# Altium PCB ASB.PcbDoc (part 2 of 2)
Units mm, origin at the board's own origin, x right, y up, seen from the top; angles counter-clockwise.
Board outline 200 x 150 mm, 4 copper layers (Top Layer, Int1 (GND), Int2, Bottom Layer), stack 1.369 mm thick; 134 components, 97 nets, 431 pads, 0 vias.
Unrouted connection lines stored in the file: 248.
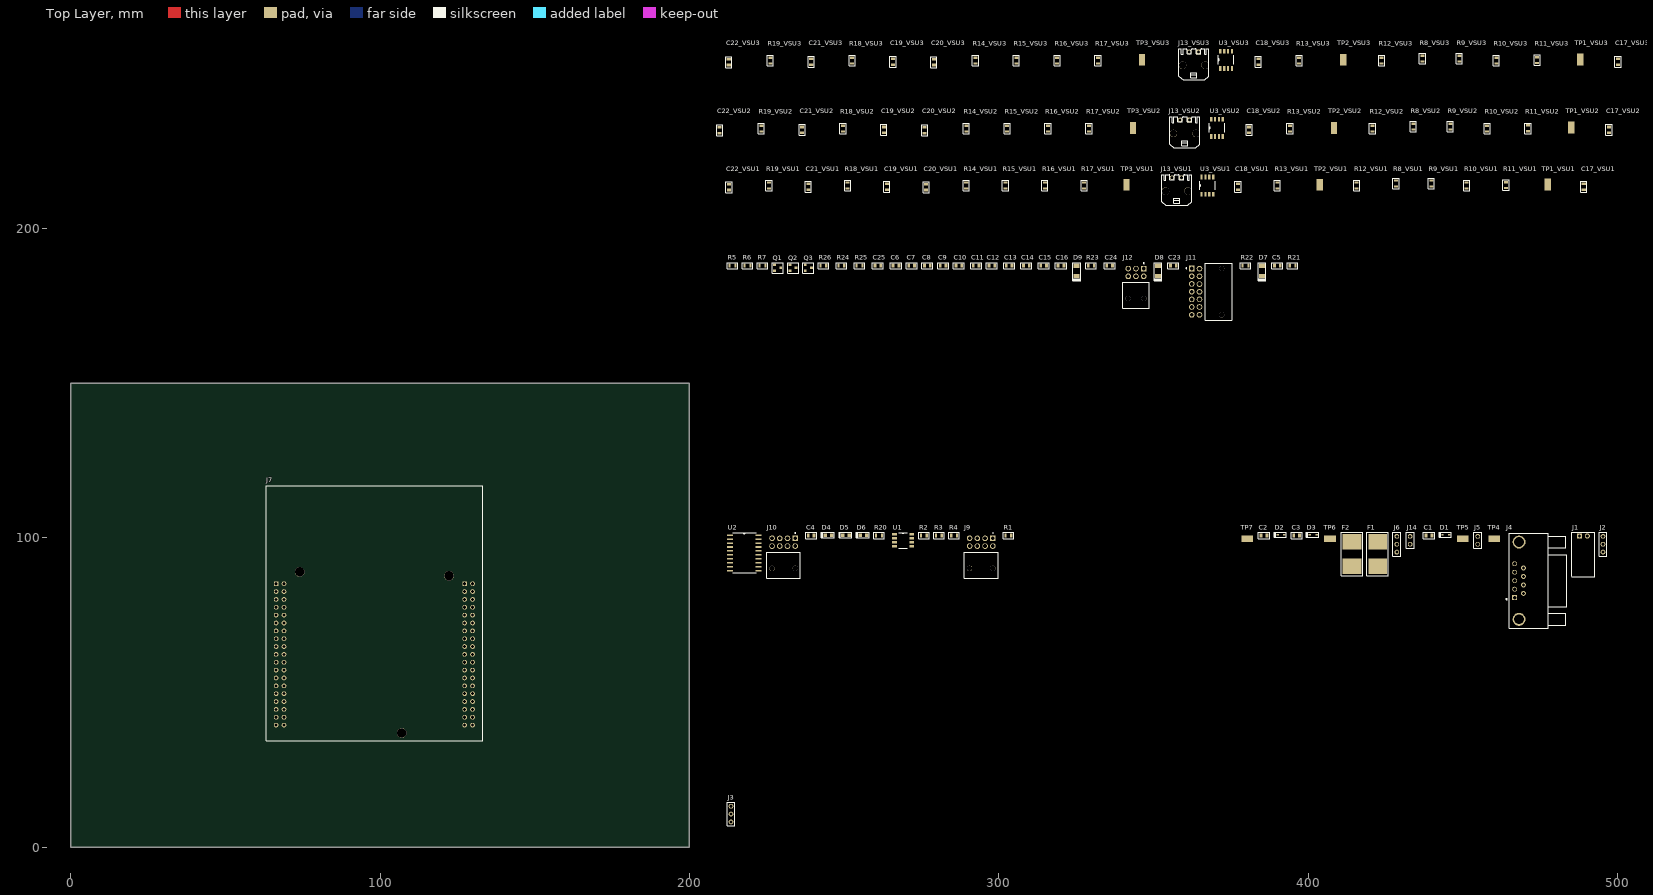
[diagram p0: Top Layer view]

## Part data (continued)
J4: library part 5747840-6, "CONN D-SUB PLUG 9POS R/A SOLDER", Case/Package=Metal, Color=Black, Current Rating=6A, Flammability Rating="UL94 V-0", Manufacturer="TE Connectivity", Max Operating Temperature=105°C, Min Operating Temperature=-55°C, Package Quantity=130, Supplier Part Number 1=A32094-ND, Voltage Rating=125V, Approvals=CSA,UL, Body Material=Metal, Body Plating=Tin, Category=Connectors, ComponentLink1Description=https://www.verical.com/server-webapp/html/getDatasheet?partID=46840&src-supplier=Verical, ComponentLink1URL=https://www.verical.com/server-webapp/html/getDatasheet?partID=46840&src-supplier=Verical, ComponentLink2Description=https://www.te.com/commerce/DocumentDelivery/DDEController?Action=srchrtrv&DocNm=82068_AMPLIMITE_Right-Angle_Posted_Conn&DocType=CS&DocLang=English&src-supplier=Digi-Key, ComponentLink2URL=https://www.te.com/commerce/DocumentDelivery/DDEController?Action=srchrtrv&DocNm=82068_AMPLIMITE_Right-Angle_Posted_Conn&DocType=CS&DocLang=English&src-supplier=Digi-Key, ComponentLink3Description=http://www.jameco.com/Jameco/Products/ProdDS/853231.pdf?src-supplier=Jameco, ComponentLink3URL=http://www.jameco.com/Jameco/Products/ProdDS/853231.pdf?src-supplier=Jameco, ComponentLink4Description=http://www.te.com/commerce/DocumentDelivery/DDEController?Action=srchrtrv&DocNm=82068_AMPLIMITE_Right-Angle_Posted_Conn&DocType=Catalog+Section&DocLang=English&src-supplier=Avnet+Europe, ComponentLink4URL=http://www.te.com/commerce/DocumentDelivery/DDEController?Action=srchrtrv&DocNm=82068_AMPLIMITE_Right-Angle_Posted_Conn&DocType=Catalog+Section&DocLang=English&src-supplier=Avnet+Europe, ComponentLink5Description=http://www.te.com/commerce/DocumentDelivery/DDEController?Action=srchrtrv&DocNm=82068_AMPLIMITE_Right-Angle_Posted_Conn&DocType=Catalog+Section&DocLang=English&src-supplier=Avnet, ComponentLink5URL=http://www.te.com/commerce/DocumentDelivery/DDEController?Action=srchrtrv&DocNm=82068_AMPLIMITE_Right-Angle_Posted_Conn&DocType=Catalog+Section&DocLang=English&src-supplier=Avnet, ComponentLink6Description=http://www.te.com/commerce/DocumentDelivery/DDEController?Action=srchrtrv&DocNm=82068_AMPLIMITE_Right-Angle_Posted_Conn&DocType=Catalog+Section&DocLang=English&PartCntxt=&src-supplier=Element14, ComponentLink6URL=http://www.te.com/commerce/DocumentDelivery/DDEController?Action=srchrtrv&DocNm=82068_AMPLIMITE_Right-Angle_Posted_Conn&DocType=Catalog+Section&DocLang=English&PartCntxt=&src-supplier=Element14, Connector Type=Plug, Contact Material=Brass, Contact Plating=Gold,Nickel,Tin, Contact Post Length=3.17mm, Contact Shape=Round, Depth=18.62mm, Gender=Male, Height=12.55mm, Hole Diameter=0.125inch, Housing Color=Black, Housing Material=Nylon, Length=30.81mm, Manufacturer Part Number=5747840-6, Material=Metal, Mating Connector Lock="Yes (With)", Mating Retention="Yes (With)", Mount="Through Hole", Number of Contacts=9, Number of Ports=1, Number of Positions=9, Number of Rows=2, Number of Terminals=9, Orientation="Right Angle", Packaging=Tray, PCB Mount Alignment="Yes (With)", PCB Mounting Orientation="Right Angle", PCB Mount Retention=With, PCB Thickness=1.57mm, Pitch=2.74mm, Plating=Tin, Preloaded=Yes, Pricing 1="1 = 4.13000, 10 = 3.96400, 25 = 3.63360, 50 = 3.46860, 130 = 3.30338, 260 = 2.89046, 520 = 2.80788, 1040 = 2.39496, 2600 = 2.22980 (USD)", Radiation Hardening=No, REACH SVHC="No SVHC", RoHS=Yes, Sealable="No (Without)", Shell Material=Steel, Stock 1=2830, Supplier 1=Digi-Key, Termination=Solder, Width=12.55mm
J5 J14: library part 0901200762, "CONN HEADER VERT 2POS 2.54MM", Color=Black, Contact Resistance=20mR, Manufacturer=Molex, Max Operating Temperature=125°C, Max Voltage Rating (AC)=350V, Min Operating Temperature=-55°C, Supplier Part Number 1=WM8084-ND, Category=Connectors, ComponentLink1Description=https://datasheet.ciiva.com/711/901200762-sd-711939.pdf?src-supplier=Digi-Key, ComponentLink1URL=https://datasheet.ciiva.com/711/901200762-sd-711939.pdf?src-supplier=Digi-Key, ComponentLink2Description=https://datasheet.ciiva.com/3117/0901200762-pcb-headers-3117809.pdf?src-supplier=Avnet, ComponentLink2URL=https://datasheet.ciiva.com/3117/0901200762-pcb-headers-3117809.pdf?src-supplier=Avnet, Connector Type="Male Pin", Contact Material=Brass, Contact Mating Length=0.266inch, Contact Plating=Gold, Depth=2.54mm, Gender=Male, Housing Color=Black, Housing Material=Polyester, Length=5.08mm, Manufacturer Part Number=0901200762, Max Voltage Rating (DC)=350V, Mount="Through Hole", Number of Contacts=2, Number of Positions=2, Number of Rows=1, Orientation=Straight, Packaging=Bulk, Pitch=2.54mm, Pricing 1="1 = 0.560000, 10 = 0.530000, 100 = 0.406000, 500 = 0.353000, 1000 = 0.291230, 5000 = 0.255930, 10000 = 0.238280 (USD)", RoHS=Yes, Stock 1=37733, Supplier 1=Digi-Key, Termination=Solder
J7: library part "STM32 Nucleo Connector", "SAMTEC         ESQ-119-24-T-D             Board-To-Board Connector, Vertical, ESQ Series, 38 Contacts, Receptacle, 2.54 mm, Through Hole 123", Manufacturer=Samtec, Manufacturer Part Number=ESQ-119-24-T-D, Supplier Part Number 1=SAM9313-ND, Category=Connectors, Contact Material=Bronze, Contact Plating=Tin, Gender=Receptacle, Mount="Through Hole", Number of Contacts=38, Number of Rows=2, Pitch=2.54mm, Pricing 1="1 = 5.23000, 11 = 4.42182, 110 = 3.41700, 506 = 2.81399, 1001 = 2.61300 (USD)", REACH SVHC="No SVHC", RoHS=Yes, Stock 1=71, Supplier 1=Digi-Key, Termination=Solder
J9 J10: library part 1053141208, "CONN HEADER R/A 8POS 2.5MM", Color=Black, Manufacturer=Molex, Supplier Part Number 1=WM14978-ND, Category=Connectors, ComponentLink1Description=https://www.molex.com/pdm_docs/ps/PS-105300-100-001.pdf?src-supplier=Digi-Key, ComponentLink1URL=https://www.molex.com/pdm_docs/ps/PS-105300-100-001.pdf?src-supplier=Digi-Key, ComponentLink2Description=http://www.farnell.com/datasheets/2059602.pdf?src-supplier=Element14, ComponentLink2URL=http://www.farnell.com/datasheets/2059602.pdf?src-supplier=Element14, Contact Material=Brass, Contact Plating=Gold, Gender=Male, Manufacturer Part Number=1053141208, Mount="Through Hole", Number of Rows=2, Pricing 1="1 = 2.35000, 10 = 2.13500, 156 = 1.82994, 624 = 1.52495, 1092 = 1.30710, 5148 = 1.15896 (USD)", REACH SVHC=Unknown, RoHS=No, Stock 1=3073, Supplier 1=Digi-Key, Termination="Through Hole"
J11: library part 1053141214, "CONN HEADER R/A 14POS 2.5MM", Manufacturer=Molex, Supplier Part Number 1=WM15164-ND, Category=Connectors, ComponentLink1Description=https://www.molex.com/pdm_docs/ps/PS-105300-100-001.pdf?src-supplier=Digi-Key, ComponentLink1URL=https://www.molex.com/pdm_docs/ps/PS-105300-100-001.pdf?src-supplier=Digi-Key, Manufacturer Part Number=1053141214, Pricing 1="1 = 3.04000, 90 = 2.55378, 180 = 2.43222, 540 = 2.06737, 1080 = 1.76334, 5040 = 1.58093 (USD)", RoHS=No, Stock 1=970, Supplier 1=Digi-Key
J12: library part 1053141206, "CONN HEADER R/A 6POS 2.5MM", Color=Black, Manufacturer=Molex, Supplier Part Number 1=WM14977-ND, Category=Connectors, ComponentLink1Description=http://www.farnell.com/datasheets/2221464.pdf?src-supplier=Farnell, ComponentLink1URL=http://www.farnell.com/datasheets/2221464.pdf?src-supplier=Farnell, ComponentLink2Description=http://www.farnell.com/datasheets/2059602.pdf?src-supplier=Element14, ComponentLink2URL=http://www.farnell.com/datasheets/2059602.pdf?src-supplier=Element14, ComponentLink3Description=https://www.molex.com/pdm_docs/ps/PS-105300-100-001.pdf?src-supplier=Digi-Key, ComponentLink3URL=https://www.molex.com/pdm_docs/ps/PS-105300-100-001.pdf?src-supplier=Digi-Key, Contact Material=Brass, Contact Plating=Gold, Gender=Male, Manufacturer Part Number=1053141206, Mount="Through Hole", Number of Rows=2, Pricing 1="1 = 1.86000, 10 = 1.68400, 204 = 1.44314, 612 = 1.20260, 1020 = 1.03080, 5100 = 0.91398, 10200 = 0.89336 (USD)", REACH SVHC=Unknown, RoHS=No, Stock 1=3725, Supplier 1=Digi-Key, Termination="Through Hole"
J13_VSU1 J13_VSU2 J13_VSU3: library part 43650-0205, "HEADER, RIGHT ANGLE, 2WAY", Current Rating=5A, Manufacturer=Molex, Package Quantity=3927, Supplier Part Number 1=WM17581-ND, Voltage Rating=600V, Category=Connectors, ComponentLink1Description=http://www.farnell.com/cad/153635.pdf?src-supplier=Element14, ComponentLink1URL=http://www.farnell.com/cad/153635.pdf?src-supplier=Element14, ComponentLink2Description=http://www.molex.com/webdocs/datasheets/pdf/en-us/0436500205_PCB_HEADERS.pdf?src-supplier=Avnet, ComponentLink2URL=http://www.molex.com/webdocs/datasheets/pdf/en-us/0436500205_PCB_HEADERS.pdf?src-supplier=Avnet, ComponentLink3Description=http://www.molex.com/webdocs/datasheets/pdf/en-us/0436500205_PCB_HEADERS.pdf?src-supplier=Avnet+Europe, ComponentLink3URL=http://www.molex.com/webdocs/datasheets/pdf/en-us/0436500205_PCB_HEADERS.pdf?src-supplier=Avnet+Europe, ComponentLink4Description=http://www.mouser.com/ds/2/276/0436500205_PCB_HEADERS-148686.pdf?src-supplier=Mouser, ComponentLink4URL=http://www.mouser.com/ds/2/276/0436500205_PCB_HEADERS-148686.pdf?src-supplier=Mouser, ComponentLink5Description=Digikey, ComponentLink5URL=https://www.digikey.com/products/en?WT.z_cid=sp_900_0310_buynow&keywords=436500205, Contact Material=Brass, Contact Plating=Gold, Gender=Male, Glow Wire Compliant=Compliant, Halogen Free="Low Halogen", Housing Material=Thermoplastic, Manufacturer Part Number=43650-0205, Number of Circuits=2, Number of Contacts=2, Number of Positions=2, Number of Rows=1, Orientation="Right Angle", Packaging=Tray, Pitch=3mm, Pricing 1="1 = 1.44000, 10 = 1.30500, 100 = 1.11870, 500 = 0.93222, 3927 = 0.74578, 7854 = 0.70849, 11781 = 0.69251 (USD)", RoHS=Yes, Stock 1=2695, Supplier 1=Digi-Key, Termination="Through Hole"
Q1 Q2 Q3: library part DMG6968U-7, "MOSFET N-CH 20V 6.5A SOT-23", Case/Package=SOT-23, Continuous Drain Current (ID)=6.5A, Drain to Source Breakdown Voltage=20V, Drain to Source Resistance=25mR, Gate to Source Voltage (Vgs)=12V, Input Capacitance=151pF, Manufacturer=Diodes, Max Operating Temperature=150°C, Max Power Dissipation=1.3W, Min Operating Temperature=-55°C, On-State Resistance=36mR, Package Quantity=3000, Supplier Part Number 1=DMG6968UDICT-ND, Threshold Voltage=500mV, Category="Discrete Semiconductor Products", ComponentLink1Description=https://datasheet.ciiva.com/5774/ds31738-5774992.pdf?src-supplier=Farnell, ComponentLink1URL=https://datasheet.ciiva.com/5774/ds31738-5774992.pdf?src-supplier=Farnell, ComponentLink2Description=https://datasheet.ciiva.com/26789/dmg6968u-7-26789941.pdf?src-supplier=IIIC, ComponentLink2URL=https://datasheet.ciiva.com/26789/dmg6968u-7-26789941.pdf?src-supplier=IIIC, ComponentLink3Description=https://datasheet.ciiva.com/935/ds31738-935016.pdf?src-supplier=Digi-Key, ComponentLink3URL=https://datasheet.ciiva.com/935/ds31738-935016.pdf?src-supplier=Digi-Key, ComponentLink4Description=https://datasheet.ciiva.com/935/ds31738-935018.pdf?src-supplier=Digi-Key, ComponentLink4URL=https://datasheet.ciiva.com/935/ds31738-935018.pdf?src-supplier=Digi-Key, ComponentLink5Description=https://datasheet.ciiva.com/935/ds31738-935017.pdf?src-supplier=Digi-Key, ComponentLink5URL=https://datasheet.ciiva.com/935/ds31738-935017.pdf?src-supplier=Digi-Key, ComponentLink6Description=https://datasheet.ciiva.com/22712/1915638-22712395.pdf?src-supplier=Element14, ComponentLink6URL=https://datasheet.ciiva.com/22712/1915638-22712395.pdf?src-supplier=Element14, Drain to Source Voltage (Vdss)=20V, Element Configuration=Single, Fall Time=205ns, Height=1mm, Lead Free="Lead Free", Length=2.9mm, Manufacturer Part Number=DMG6968U-7, Mount="Surface Mount", Nominal Vgs=500mV, Number of Channels=1, Number of Elements=1, Number of Pins=3, Packaging="Tape and Reel", Power Dissipation=1.3W, Pricing 1="1 = 0.59000, 10 = 0.41800, 100 = 0.27420, 500 = 0.16202, 1000 = 0.12463 (USD)", Radiation Hardening=No, Rds On Max=25mR, REACH SVHC="No SVHC", Rise Time=66ns, RoHS=Yes, Stock 1=169109, Supplier 1=Digi-Key, Turn-Off Delay Time=613ns, Turn-On Delay Time=54ns, Weight=0.000282oz, Width=1.3mm
R1 R13_VSU1 R13_VSU2 R13_VSU3 R19_VSU1 R19_VSU2 R19_VSU3 R21 R22 R23: library part ERJ6ENF1001V, "RES SMD 1K OHM 1% 1/8W 0805", Case/Package=0805, Case Code (Metric)=2012, Manufacturer=Panasonic, Max Operating Temperature=155°C, Max Power Dissipation=125mW, Min Operating Temperature=-55°C, Package Quantity=1, Resistance=1kR, Supplier Part Number 1=P1.00KCCT-ND, Temperature Coefficient=100ppm/°C, Tolerance=1%, Voltage Rating=150V, Case Code (Imperial)=0805, Category=Resistors, ComponentLink1Description=https://datasheet.ciiva.com/34303/1988962-34303619.pdf?src-supplier=Jameco, ComponentLink1URL=https://datasheet.ciiva.com/34303/1988962-34303619.pdf?src-supplier=Jameco, ComponentLink2Description=https://datasheet.ciiva.com/11808/0900766b80f80784-11808500.pdf?src-supplier=RSComponents, ComponentLink2URL=https://datasheet.ciiva.com/11808/0900766b80f80784-11808500.pdf?src-supplier=RSComponents, ComponentLink3Description=https://datasheet.ciiva.com/28532/426256-28532134.pdf?src-supplier=Element14, ComponentLink3URL=https://datasheet.ciiva.com/28532/426256-28532134.pdf?src-supplier=Element14, ComponentLink4Description=https://datasheet.ciiva.com/30051/aoa0000ce2-30051974.pdf?src-supplier=Onlinecomponents.com, ComponentLink4URL=https://datasheet.ciiva.com/30051/aoa0000ce2-30051974.pdf?src-supplier=Onlinecomponents.com, ComponentLink5Description=https://datasheet.ciiva.com/16774/70260748-16774249.pdf?src-supplier=Allied+Electronics, ComponentLink5URL=https://datasheet.ciiva.com/16774/70260748-16774249.pdf?src-supplier=Allied+Electronics, ComponentLink6Description=https://datasheet.ciiva.com/46373/1678782-46373337.pdf?src-supplier=Element14, ComponentLink6URL=https://datasheet.ciiva.com/46373/1678782-46373337.pdf?src-supplier=Element14, ComponentLink7Description=https://datasheet.ciiva.com/46373/1678782-46373338.pdf?src-supplier=Element14, ComponentLink7URL=https://datasheet.ciiva.com/46373/1678782-46373338.pdf?src-supplier=Element14, ComponentLink8Description=https://datasheet.ciiva.com/48532/aoa0000ce2-48532156.pdf?src-supplier=Avnet, ComponentLink8URL=https://datasheet.ciiva.com/48532/aoa0000ce2-48532156.pdf?src-supplier=Avnet, ComponentLink9Description=https://datasheet.ciiva.com/7942/426256-7942429.pdf?src-supplier=Element14, ComponentLink9URL=https://datasheet.ciiva.com/7942/426256-7942429.pdf?src-supplier=Element14, ComponentLink10Description=https://datasheet.ciiva.com/16199/aoa0000ce2-16199262.pdf?src-supplier=Future+Electronics, ComponentLink10URL=https://datasheet.ciiva.com/16199/aoa0000ce2-16199262.pdf?src-supplier=Future+Electronics, ComponentLink11Description=https://datasheet.ciiva.com/9117/aoa0000ce2-9117391.pdf?src-supplier=Avnet, ComponentLink11URL=https://datasheet.ciiva.com/9117/aoa0000ce2-9117391.pdf?src-supplier=Avnet, ComponentLink12Description=https://datasheet.ciiva.com/16523/aoa0000ce2-16523855.pdf?src-supplier=Avnet+Asia, ComponentLink12URL=https://datasheet.ciiva.com/16523/aoa0000ce2-16523855.pdf?src-supplier=Avnet+Asia, Composition="Thick Film", Contact Plating=Tin, Depth=1.25mm, Features="Automotive AEC-Q200", Height=0.6mm, Lead Free="Lead Free", Length=2mm, Manufacturer Part Number=ERJ6ENF1001V, Military Standard=Not, Mount="Surface Mount", Number of Pins=2, Number of Terminations=2, Packaging="Tape and Reel", Power Rating=125mW, Pricing 1="1 = 0.100000, 10 = 0.081000, 100 = 0.031100, 1000 = 0.013670, 2500 = 0.011810 (USD)", Radiation Hardening=No, REACH SVHC="No SVHC", RoHS=Yes, Stock 1=946321, Supplier 1=Digi-Key, Termination=SMD/SMT, Voltage Rating (DC)=150V, Width=0.049inch
R2 R3 R4 R24 R25 R26: library part ERJ6ENF1500V, "RES SMD 150 OHM 1% 1/8W 0805", Case/Package=0805, Case Code (Metric)=2012, Manufacturer=Panasonic, Max Operating Temperature=155°C, Max Power Dissipation=125mW, Min Operating Temperature=-55°C, Package Quantity=1, Resistance=150R, Supplier Part Number 1=P150CCT-ND, Temperature Coefficient=100ppm/°C, Tolerance=1%, Voltage Rating=150V, Case Code (Imperial)=0805, Category=Resistors, ComponentLink1Description=https://datasheet.ciiva.com/11821/0900766b80f80784-11821520.pdf?src-supplier=RSComponents, ComponentLink1URL=https://datasheet.ciiva.com/11821/0900766b80f80784-11821520.pdf?src-supplier=RSComponents, ComponentLink2Description=https://datasheet.ciiva.com/7887/426256-7887029.pdf?src-supplier=Element14, ComponentLink2URL=https://datasheet.ciiva.com/7887/426256-7887029.pdf?src-supplier=Element14, ComponentLink3Description=https://datasheet.ciiva.com/16761/70260748-16761222.pdf?src-supplier=Allied+Electronics, ComponentLink3URL=https://datasheet.ciiva.com/16761/70260748-16761222.pdf?src-supplier=Allied+Electronics, ComponentLink4Description=https://datasheet.ciiva.com/46373/1678782-46373270.pdf?src-supplier=Element14, ComponentLink4URL=https://datasheet.ciiva.com/46373/1678782-46373270.pdf?src-supplier=Element14, ComponentLink5Description=https://datasheet.ciiva.com/46373/1678782-46373271.pdf?src-supplier=Element14, ComponentLink5URL=https://datasheet.ciiva.com/46373/1678782-46373271.pdf?src-supplier=Element14, ComponentLink6Description=https://datasheet.ciiva.com/30203/aoa0000ce2-30203641.pdf?src-supplier=Onlinecomponents.com, ComponentLink6URL=https://datasheet.ciiva.com/30203/aoa0000ce2-30203641.pdf?src-supplier=Onlinecomponents.com, ComponentLink7Description=https://datasheet.ciiva.com/9185/aoa0000ce2-9185514.pdf?src-supplier=Avnet, ComponentLink7URL=https://datasheet.ciiva.com/9185/aoa0000ce2-9185514.pdf?src-supplier=Avnet, Composition="Thick Film", Contact Plating=Tin, Depth=1.25mm, Features="Automotive AEC-Q200", Height=0.6mm, Lead Free="Lead Free", Length=2mm, Manufacturer Part Number=ERJ6ENF1500V, Military Standard=Not, Mount="Surface Mount", Number of Pins=2, Number of Terminations=2, Power Rating=125mW, Pricing 1="1 = 0.10000, 10 = 0.08100, 100 = 0.03110, 1000 = 0.01367, 2500 = 0.01181 (USD)", Radiation Hardening=No, REACH SVHC="No SVHC", RoHS=Yes, Stock 1=287199, Supplier 1=Digi-Key, Termination=SMD/SMT, Voltage Rating (DC)=150V, Width=0.049inch, Working Voltage=150V
R5 R6 R7 R11_VSU1 R11_VSU2 R11_VSU3 R17_VSU1 R17_VSU2 R17_VSU3: library part ERJ6ENF2002V, "RES SMD 20K OHM 1% 1/8W 0805", Case/Package=0805, Case Code (Metric)=2012, Manufacturer=Panasonic, Max Operating Temperature=155°C, Max Power Dissipation=125mW, Min Operating Temperature=-55°C, Package Quantity=1, Resistance=20kR, Supplier Part Number 1=P20.0KCCT-ND, Temperature Coefficient=100ppm/°C, Tolerance=1%, Voltage Rating=150V, Case Code (Imperial)=0805, Category=Resistors, ComponentLink1Description=https://datasheet.ciiva.com/11821/0900766b80f80784-11821565.pdf?src-supplier=RSComponents, ComponentLink1URL=https://datasheet.ciiva.com/11821/0900766b80f80784-11821565.pdf?src-supplier=RSComponents, ComponentLink2Description=https://datasheet.ciiva.com/30072/aoa0000ce2-30072453.pdf?src-supplier=Onlinecomponents.com, ComponentLink2URL=https://datasheet.ciiva.com/30072/aoa0000ce2-30072453.pdf?src-supplier=Onlinecomponents.com, ComponentLink3Description=https://datasheet.ciiva.com/43460/426256-43460054.pdf?src-supplier=Farnell, ComponentLink3URL=https://datasheet.ciiva.com/43460/426256-43460054.pdf?src-supplier=Farnell, ComponentLink4Description=https://datasheet.ciiva.com/16786/70260748-16786968.pdf?src-supplier=Allied+Electronics, ComponentLink4URL=https://datasheet.ciiva.com/16786/70260748-16786968.pdf?src-supplier=Allied+Electronics, ComponentLink5Description=https://datasheet.ciiva.com/9192/aoa0000ce2-9192153.pdf?src-supplier=Avnet, ComponentLink5URL=https://datasheet.ciiva.com/9192/aoa0000ce2-9192153.pdf?src-supplier=Avnet, ComponentLink6Description=https://datasheet.ciiva.com/48531/aoa0000ce2-48531785.pdf?src-supplier=Avnet, ComponentLink6URL=https://datasheet.ciiva.com/48531/aoa0000ce2-48531785.pdf?src-supplier=Avnet, ComponentLink7Description=https://datasheet.ciiva.com/15159/getdatasheetpartid-249649-15159066.pdf?src-supplier=Verical, ComponentLink7URL=https://datasheet.ciiva.com/15159/getdatasheetpartid-249649-15159066.pdf?src-supplier=Verical, ComponentLink8Description=https://datasheet.ciiva.com/17211/aoa0000ce2-17211115.pdf?src-supplier=Avnet+Europe, ComponentLink8URL=https://datasheet.ciiva.com/17211/aoa0000ce2-17211115.pdf?src-supplier=Avnet+Europe, ComponentLink9Description=https://datasheet.ciiva.com/46389/426256-46389083.pdf?src-supplier=Element14, ComponentLink9URL=https://datasheet.ciiva.com/46389/426256-46389083.pdf?src-supplier=Element14, ComponentLink10Description=https://datasheet.ciiva.com/46377/426256-46377356.pdf?src-supplier=Element14, ComponentLink10URL=https://datasheet.ciiva.com/46377/426256-46377356.pdf?src-supplier=Element14, ComponentLink11Description=https://datasheet.ciiva.com/24025/aoa0000ce2-24025709.pdf?src-supplier=Mouser, ComponentLink11URL=https://datasheet.ciiva.com/24025/aoa0000ce2-24025709.pdf?src-supplier=Mouser, ComponentLink12Description=https://datasheet.ciiva.com/28688/1678782-28688637.pdf?src-supplier=Element14, ComponentLink12URL=https://datasheet.ciiva.com/28688/1678782-28688637.pdf?src-supplier=Element14, ComponentLink13Description=https://datasheet.ciiva.com/16512/aoa0000ce2-16512158.pdf?src-supplier=Avnet+Asia, ComponentLink13URL=https://datasheet.ciiva.com/16512/aoa0000ce2-16512158.pdf?src-supplier=Avnet+Asia, ComponentLink14Description=https://datasheet.ciiva.com/22749/1678782-22749662.pdf?src-supplier=Element14, ComponentLink14URL=https://datasheet.ciiva.com/22749/1678782-22749662.pdf?src-supplier=Element14, Composition="Thick Film", Contact Plating=Tin, Depth=1.25mm, Features="Automotive AEC-Q200", Height=0.6mm, Lead Free="Lead Free", Length=2mm, Manufacturer Part Number=ERJ6ENF2002V, Military Standard=Not, Mount="Surface Mount", Number of Terminations=2, Packaging="Tape and Reel", Power Rating=125mW, Pricing 1="1 = 0.10000, 10 = 0.08100, 100 = 0.03110, 1000 = 0.01367, 2500 = 0.01181 (USD)", Radiation Hardening=No, REACH SVHC="No SVHC", RoHS=Yes, Stock 1=1039498, Supplier 1=Digi-Key, Termination=SMD/SMT, Voltage Rating (DC)=150V, Width=0.049inch, Working Voltage=150V
R8_VSU1 R8_VSU2 R8_VSU3 R9_VSU1 R9_VSU2 R9_VSU3 R10_VSU1 R10_VSU2 R10_VSU3 R14_VSU1 R14_VSU2 R14_VSU3 R15_VSU1 R15_VSU2 R15_VSU3 R16_VSU1 R16_VSU2 R16_VSU3: library part ERJ6ENF3001V, "RES SMD 3K OHM 1% 1/8W 0805", Case/Package=0805, Case Code (Metric)=2012, Manufacturer=Panasonic, Max Operating Temperature=155°C, Max Power Dissipation=125mW, Min Operating Temperature=-55°C, Package Quantity=1, Resistance=3kR, Supplier Part Number 1=P3.0KCCT-ND, Temperature Coefficient=100ppm/°C, Tolerance=1%, Voltage Rating=150V, Case Code (Imperial)=0805, Category=Resistors, ComponentLink1Description=https://datasheet.ciiva.com/11821/0900766b80f80784-11821622.pdf?src-supplier=RSComponents, ComponentLink1URL=https://datasheet.ciiva.com/11821/0900766b80f80784-11821622.pdf?src-supplier=RSComponents, ComponentLink2Description=https://datasheet.ciiva.com/30198/aoa0000ce2-30198229.pdf?src-supplier=Onlinecomponents.com, ComponentLink2URL=https://datasheet.ciiva.com/30198/aoa0000ce2-30198229.pdf?src-supplier=Onlinecomponents.com, ComponentLink3Description=https://datasheet.ciiva.com/17213/aoa0000ce2-17213863.pdf?src-supplier=Avnet+Europe, ComponentLink3URL=https://datasheet.ciiva.com/17213/aoa0000ce2-17213863.pdf?src-supplier=Avnet+Europe, ComponentLink4Description=https://datasheet.ciiva.com/24165/aoa0000ce2-24165784.pdf?src-supplier=Mouser, ComponentLink4URL=https://datasheet.ciiva.com/24165/aoa0000ce2-24165784.pdf?src-supplier=Mouser, ComponentLink5Description=https://datasheet.ciiva.com/9117/aoa0000ce2-9117481.pdf?src-supplier=Avnet, ComponentLink5URL=https://datasheet.ciiva.com/9117/aoa0000ce2-9117481.pdf?src-supplier=Avnet, ComponentLink6Description=https://datasheet.ciiva.com/28691/1678782-28691979.pdf?src-supplier=Element14, ComponentLink6URL=https://datasheet.ciiva.com/28691/1678782-28691979.pdf?src-supplier=Element14, ComponentLink7Description=https://datasheet.ciiva.com/46386/426256-46386363.pdf?src-supplier=Element14, ComponentLink7URL=https://datasheet.ciiva.com/46386/426256-46386363.pdf?src-supplier=Element14, ComponentLink8Description=https://datasheet.ciiva.com/16758/70260748-16758588.pdf?src-supplier=Allied+Electronics, ComponentLink8URL=https://datasheet.ciiva.com/16758/70260748-16758588.pdf?src-supplier=Allied+Electronics, ComponentLink9Description=https://datasheet.ciiva.com/6137/426256-6137581.pdf?src-supplier=Farnell, ComponentLink9URL=https://datasheet.ciiva.com/6137/426256-6137581.pdf?src-supplier=Farnell, ComponentLink10Description=https://datasheet.ciiva.com/46373/426256-46373965.pdf?src-supplier=Element14, ComponentLink10URL=https://datasheet.ciiva.com/46373/426256-46373965.pdf?src-supplier=Element14, ComponentLink11Description=https://datasheet.ciiva.com/28565/1678782-28565182.pdf?src-supplier=Element14, ComponentLink11URL=https://datasheet.ciiva.com/28565/1678782-28565182.pdf?src-supplier=Element14, ComponentLink12Description=https://datasheet.ciiva.com/16762/70260748-16762943.pdf?src-supplier=Allied+Electronics, ComponentLink12URL=https://datasheet.ciiva.com/16762/70260748-16762943.pdf?src-supplier=Allied+Electronics, Composition="Thick Film", Contact Plating=Tin, Depth=1.25mm, Features="Automotive AEC-Q200", Height=0.6mm, Length=2mm, Manufacturer Part Number=ERJ6ENF3001V, Military Standard=Not, Mount="Surface Mount", Number of Terminations=2, Packaging="Tape and Reel", Power Rating=125mW, Pricing 1="1 = 0.10000, 10 = 0.08100, 100 = 0.03110, 1000 = 0.01367, 2500 = 0.01181 (USD)", Radiation Hardening=No, REACH SVHC="No SVHC", RoHS=Yes, Stock 1=514759, Supplier 1=Digi-Key, Termination=SMD/SMT, Voltage Rating (DC)=150V, Weight=0.000194oz, Width=0.049inch
R12_VSU1 R12_VSU2 R12_VSU3 R18_VSU1 R18_VSU2 R18_VSU3: library part ERJ6ENF6201V, "RES SMD 6.2K OHM 1% 1/8W 0805", Case/Package=0805, Case Code (Metric)=2012, Manufacturer=Panasonic, Max Operating Temperature=155°C, Max Power Dissipation=125mW, Min Operating Temperature=-55°C, Package Quantity=1, Resistance=6.2kR, Supplier Part Number 1=P6.20KCCT-ND, Temperature Coefficient=100ppm/°C, Tolerance=1%, Voltage Rating=150V, Case Code (Imperial)=0805, Category=Resistors, ComponentLink1Description=https://datasheet.ciiva.com/11821/0900766b80f80784-11821682.pdf?src-supplier=RSComponents, ComponentLink1URL=https://datasheet.ciiva.com/11821/0900766b80f80784-11821682.pdf?src-supplier=RSComponents, ComponentLink2Description=https://datasheet.ciiva.com/46373/1678782-46373789.pdf?src-supplier=Element14, ComponentLink2URL=https://datasheet.ciiva.com/46373/1678782-46373789.pdf?src-supplier=Element14, ComponentLink3Description=https://datasheet.ciiva.com/46373/1678782-46373790.pdf?src-supplier=Element14, ComponentLink3URL=https://datasheet.ciiva.com/46373/1678782-46373790.pdf?src-supplier=Element14, Composition="Thick Film", Contact Plating=Tin, Depth=1.25mm, Features="Automotive AEC-Q200", Height=0.6mm, Length=2mm, Manufacturer Part Number=ERJ6ENF6201V, Military Standard=Not, Mount="Surface Mount", Number of Terminations=2, Packaging="Tape and Reel", Power Rating=125mW, Pricing 1="1 = 0.10000, 10 = 0.08100, 100 = 0.03110, 1000 = 0.01367, 2500 = 0.01181 (USD)", Radiation Hardening=No, REACH SVHC="No SVHC", RoHS=Yes, Stock 1=65881, Supplier 1=Digi-Key, Termination=SMD/SMT, Voltage Rating (DC)=150V, Weight=0.000194oz, Width=1.2mm
R20: library part ERJ6ENF1200V, "RES SMD 120 OHM 1% 1/8W 0805", Case/Package=0805, Case Code (Metric)=2012, Manufacturer=Panasonic, Max Operating Temperature=155°C, Max Power Dissipation=125mW, Min Operating Temperature=-55°C, Package Quantity=1, Resistance=120R, Supplier Part Number 1=P120CCT-ND, Temperature Coefficient=100ppm/°C, Tolerance=1%, Voltage Rating=150V, Case Code (Imperial)=0805, Category=Resistors, ComponentLink1Description=https://datasheet.ciiva.com/11821/0900766b80f80784-11821533.pdf?src-supplier=RSComponents, ComponentLink1URL=https://datasheet.ciiva.com/11821/0900766b80f80784-11821533.pdf?src-supplier=RSComponents, ComponentLink2Description=https://datasheet.ciiva.com/22673/1678782-22673701.pdf?src-supplier=Element14, ComponentLink2URL=https://datasheet.ciiva.com/22673/1678782-22673701.pdf?src-supplier=Element14, ComponentLink3Description=https://datasheet.ciiva.com/15158/getdatasheetpartid-248620-15158999.pdf?src-supplier=Verical, ComponentLink3URL=https://datasheet.ciiva.com/15158/getdatasheetpartid-248620-15158999.pdf?src-supplier=Verical, ComponentLink4Description=https://datasheet.ciiva.com/16782/70260748-16782215.pdf?src-supplier=Allied+Electronics, ComponentLink4URL=https://datasheet.ciiva.com/16782/70260748-16782215.pdf?src-supplier=Allied+Electronics, ComponentLink5Description=https://datasheet.ciiva.com/24069/aoa0000ce2-24069192.pdf?src-supplier=Mouser, ComponentLink5URL=https://datasheet.ciiva.com/24069/aoa0000ce2-24069192.pdf?src-supplier=Mouser, ComponentLink6Description=https://datasheet.ciiva.com/46373/1678782-46373272.pdf?src-supplier=Element14, ComponentLink6URL=https://datasheet.ciiva.com/46373/1678782-46373272.pdf?src-supplier=Element14, ComponentLink7Description=https://datasheet.ciiva.com/46373/1678782-46373273.pdf?src-supplier=Element14, ComponentLink7URL=https://datasheet.ciiva.com/46373/1678782-46373273.pdf?src-supplier=Element14, ComponentLink8Description=https://datasheet.ciiva.com/17207/aoa0000ce2-17207722.pdf?src-supplier=Avnet+Europe, ComponentLink8URL=https://datasheet.ciiva.com/17207/aoa0000ce2-17207722.pdf?src-supplier=Avnet+Europe, ComponentLink9Description=https://datasheet.ciiva.com/6082/426256-6082139.pdf?src-supplier=Farnell, ComponentLink9URL=https://datasheet.ciiva.com/6082/426256-6082139.pdf?src-supplier=Farnell, ComponentLink10Description=https://datasheet.ciiva.com/22687/1678782-22687419.pdf?src-supplier=Element14, ComponentLink10URL=https://datasheet.ciiva.com/22687/1678782-22687419.pdf?src-supplier=Element14, ComponentLink11Description=https://datasheet.ciiva.com/7886/426256-7886749.pdf?src-supplier=Element14, ComponentLink11URL=https://datasheet.ciiva.com/7886/426256-7886749.pdf?src-supplier=Element14, ComponentLink12Description=https://datasheet.ciiva.com/9117/aoa0000ce2-9117405.pdf?src-supplier=Avnet, ComponentLink12URL=https://datasheet.ciiva.com/9117/aoa0000ce2-9117405.pdf?src-supplier=Avnet, ComponentLink13Description=https://datasheet.ciiva.com/16765/70260748-16765246.pdf?src-supplier=Allied+Electronics, ComponentLink13URL=https://datasheet.ciiva.com/16765/70260748-16765246.pdf?src-supplier=Allied+Electronics, ComponentLink14Description=https://datasheet.ciiva.com/16514/aoa0000ce2-16514031.pdf?src-supplier=Avnet+Asia, ComponentLink14URL=https://datasheet.ciiva.com/16514/aoa0000ce2-16514031.pdf?src-supplier=Avnet+Asia, Composition="Thick Film", Contact Plating=Tin, Depth=1.25mm, Features="Automotive AEC-Q200", Height=0.6mm, Lead Free="Lead Free", Length=2mm, Manufacturer Part Number=ERJ6ENF1200V, Military Standard=Not, Mount="Surface Mount", Number of Pins=2, Number of Terminations=2, Packaging="Tape and Reel", Power Rating=125mW, Pricing 1="1 = 0.10000, 10 = 0.08100, 100 = 0.03110, 1000 = 0.01367, 2500 = 0.01181 (USD)", Radiation Hardening=No, REACH SVHC="No SVHC", RoHS=Yes, Stock 1=309479, Supplier 1=Digi-Key, Termination=SMD/SMT, Voltage Rating (DC)=150V, Width=1.2mm
TP1_VSU1 TP1_VSU2 TP1_VSU3 TP2_VSU1 TP2_VSU2 TP2_VSU3 TP3_VSU1 TP3_VSU2 TP3_VSU3 TP4 TP5 TP6 TP7: library part 5019, "Phosphor Bronze Contact Miniature Silver Plated Surface Mount Test Points", Manufacturer="Keystone Electronics", Package Quantity=1, Supplier Part Number 1=36-5019CT-ND, Category="Test and Measurement", ComponentLink1Description=http://www.keyelco.com/userAssets/file/M60-2p61.pdf?src-supplier=Digi-Key, ComponentLink1URL=http://www.keyelco.com/userAssets/file/M60-2p61.pdf?src-supplier=Digi-Key, ComponentLink2Description=https://www.alliedelec.com/m/d/7cde97af424e5e26d7fd34350071af05.pdf?src-supplier=Allied+Electronics, ComponentLink2URL=https://www.alliedelec.com/m/d/7cde97af424e5e26d7fd34350071af05.pdf?src-supplier=Allied+Electronics, ComponentLink3Description=http://www.keyelco.com/userAssets/file/M60-2p61.pdf?src-supplier=Future+Electronics, ComponentLink3URL=http://www.keyelco.com/userAssets/file/M60-2p61.pdf?src-supplier=Future+Electronics, ComponentLink4Description=Digikey, ComponentLink4URL=https://www.digikey.com/product-detail/en/keystone-electronics/5019/36-5019CT-ND/3907344, Contact Material=Bronze, Contact Plating=Silver, Height=0.09inch, Lead Free="Lead Free", Manufacturer Part Number=5019, Material=Bronze, Mount="PCB,Surface Mount", Number of Pins=1, Packaging="Tape and Reel", Pricing 1="1 = 0.35000, 10 = 0.33100, 25 = 0.28400, 50 = 0.24120, 100 = 0.23180, 250 = 0.20812, 500 = 0.19866 (USD)", REACH SVHC="No SVHC", RoHS=Yes, Stock 1=396064, Supplier 1=Digi-Key, Termination=SMD/SMT
U1: library part MCP2551-E/SN, "IC, TRANSCEIVER, CAN, SMD, 8SOIC", Case/Package=SOIC, Manufacturer=Microchip, Max Operating Temperature=125°C, Max Supply Current=75mA, Max Supply Voltage=5.5V, Min Operating Temperature=-40°C, Min Supply Voltage=4.5V, Operating Supply Voltage=5V, Package Quantity=100, Supplier Part Number 1=MCP2551-E/SN-ND, Category="Integrated Circuits (ICs)", ComponentLink1Description=http://www.microchip.com/mymicrochip/filehandler.aspx?ddocname=en011797&src-supplier=Future+Electronics, ComponentLink1URL=http://www.microchip.com/mymicrochip/filehandler.aspx?ddocname=en011797&src-supplier=Future+Electronics, ComponentLink2Description=http://www.microchip.com/mymicrochip/filehandler.aspx?ddocname=en023833&src-supplier=Digi-Key, ComponentLink2URL=http://www.microchip.com/mymicrochip/filehandler.aspx?ddocname=en023833&src-supplier=Digi-Key, ComponentLink3Description=http://www.mouser.com/ds/2/268/20001667G-1115479.pdf?src-supplier=Mouser, ComponentLink3URL=http://www.mouser.com/ds/2/268/20001667G-1115479.pdf?src-supplier=Mouser, ComponentLink4Description=https://www.distrelec.biz/Web/Downloads/_t/ds/mcp2551_eng_tds.pdf?mime=application%2Fpdf&src-supplier=Distrelec, ComponentLink4URL=https://www.distrelec.biz/Web/Downloads/_t/ds/mcp2551_eng_tds.pdf?mime=application%2Fpdf&src-supplier=Distrelec, ComponentLink5Description=http://www.farnell.com/datasheets/2299423.pdf?src-supplier=Element14, ComponentLink5URL=http://www.farnell.com/datasheets/2299423.pdf?src-supplier=Element14, ComponentLink6Description=Digikey, ComponentLink6URL=https://www.digikey.ca/product-detail/en/microchip-technology/MCP2551-E-SN/MCP2551-E-SN-ND/509446, Contact Plating=Matte,Tin, Data Rate=1Mbps, Height=0.059inch, Interface=CAN,Serial, Lead Free="Lead Free", Length=0.192inch, Logic Function=Transceiver, Manufacturer Part Number=MCP2551-E/SN, Mount="Surface Mount", Nominal Supply Current=75mA, Number of Drivers=1, Number of Pins=8, Number of Receive Buffers=1, Number of Receivers=1, Number of Transceivers=1, Number of Transmit Buffers=1, Packaging=Rail/Tube, Pricing 1="1 = 1.22000, 25 = 1.00960, 100 = 0.91670 (USD)", Radiation Hardening=No, REACH SVHC="No SVHC", RoHS=Yes, Stock 1=9215, Supplier 1=Digi-Key, Width=0.154inch
U2: library part TLV2556IDW, "IC SERIAL ADC 12-BIT 5V 20-SOIC", Case/Package=SOIC, Manufacturer="Texas Instruments", Max Operating Temperature=85°C, Max Power Dissipation=2.43mW, Max Supply Voltage=5.5V, Min Operating Temperature=-40°C, Min Supply Voltage=2.7V, Nominal Supply Current=3mA, Package Quantity=25, Supplier Part Number 1=296-12502-5-ND, Category="Integrated Circuits (ICs)", ComponentLink1Description=http://www.ti.com/lit/ds/symlink/tlv2556.pdf?src-supplier=Digi-Key, ComponentLink1URL=http://www.ti.com/lit/ds/symlink/tlv2556.pdf?src-supplier=Digi-Key, ComponentLink2Description=http://www.ti.com/general/docs/lit/getliterature.tsp?genericPartNumber=TLV2556&&fileType=pdf&src-supplier=Avnet, ComponentLink2URL=http://www.ti.com/general/docs/lit/getliterature.tsp?genericPartNumber=TLV2556&&fileType=pdf&src-supplier=Avnet, ComponentLink3Description=http://datasheet.iiic.cc/texas_instruments/TLV2556IDW.pdf?src-supplier=IIIC, ComponentLink3URL=http://datasheet.iiic.cc/texas_instruments/TLV2556IDW.pdf?src-supplier=IIIC, ComponentLink4Description=http://www.produktinfo.conrad.com/datenblaetter/1100000-1199999/001186451-da-01-en-IC_SERIAL_ADC_12__TLV2556IDW_SOIC_20_TID.pdf?src-supplier=Conrad, ComponentLink4URL=http://www.produktinfo.conrad.com/datenblaetter/1100000-1199999/001186451-da-01-en-IC_SERIAL_ADC_12__TLV2556IDW_SOIC_20_TID.pdf?src-supplier=Conrad, Conversion Rate=200KS/s, Differential Nonlinearity=1LSB, Integral Nonlinearity (INL)=1LSB, Interface=SPI, Lead Free="Lead Free", Manufacturer Part Number=TLV2556IDW, Max Supply Voltage (DC)=5.5V, Min Supply Voltage (DC)=2.7V, Number of A/D Converters=1, Number of Analog Inputs=11, Number of Bits=12, Number of Channels=11, Number of Converters=1, Number of Elements=1, Number of Inputs=11, Number of Pins=20, Packaging=Rail/Tube, Polarity=Unipolar, Power Consumption=2.43mW, Pricing 1="1 = 10.04000, 10 = 9.06900, 25 = 8.64680, 100 = 7.50800, 500 = 6.53790, 1000 = 5.69430 (USD)", REACH SVHC="No SVHC", Resolution=12b, RoHS=Yes, Sampling Rate=200KS/s, Stock 1=5611, Supplier 1=Digi-Key, Supply Type=Single
U3_VSU1 U3_VSU2 U3_VSU3: library part LT1677IS8#TRPBF, "IC OPAMP GP 7.2MHZ RRO 8SO", Case/Package=SOIC, Input Bias Current=2nA, Input Offset Voltage (Vos)=60uV, Manufacturer="Analog Devices / Linear Technology", Max Dual Supply Voltage=18V, Max Operating Temperature=85°C, Max Supply Voltage=44V, Min Dual Supply Voltage=1.5V, Min Operating Temperature=-40°C, Min Supply Voltage=2.5V, Operating Supply Current=2.75mA, Output Current per Channel=35mA, Package Quantity=2500, Power Supply Rejection Ratio (PSRR)=108dB, Supplier Part Number 1=LT1677IS8#TRPBFCT-ND, Voltage Gain=133.98dB, Category="Integrated Circuits (ICs)", Common Mode Rejection Ratio=60dB, ComponentLink1Description=http://www.linear.com/docs/2102?src-supplier=Digi-Key, ComponentLink1URL=http://www.linear.com/docs/2102?src-supplier=Digi-Key, ComponentLink2Description=http://datasheet.iiic.cc/linear_technology/LT1677IS8_TRPBF.pdf?src-supplier=IIIC, ComponentLink2URL=http://datasheet.iiic.cc/linear_technology/LT1677IS8_TRPBF.pdf?src-supplier=IIIC, Gain Bandwidth Product=7.2MHz, Lead Free="Lead Free", Manufacturer Part Number=LT1677IS8#TRPBF, Nominal Gain Bandwidth Product=7.2MHz, Number of Channels=1, Number of Circuits=1, Number of Elements=1, Number of Pins=8, Packaging="Tape and Reel", Pricing 1="1 = 5.74000, 25 = 5.12560 (USD)", RoHS=Yes, Slew Rate=2.5V/µs, Stock 1=4539, Supplier 1=Digi-Key, Unity Gain Bandwidth Product=7.2MHz

## Nets (pads, with @x,y where several pads share a name; then routed paths per layer and width w, separated by ;. In a path a pad name is that pad's centre, name@x,y a point inside that pad or via, vN(x,y) a via of type N, cw(c..) or ccw(c..) an arc to the next point about the centre after c; other vN are vias at no path point)
3.3V: C5.2 J3.2 J9.2 J10.2 R2.2 R3.2 R4.2 TP5.1 U2.20
5V: C4.2 J6.2 TP6.1 U1.3
12V: C1.2 C19_VSU1.2 C19_VSU2.2 C19_VSU3.2 D1.2 D7.2 D8.2 D9.2 F2.1 J11.2 J12.2 J12.4 J12.6 J14.2 R21.2 R22.2 R23.2 TP4.1 U3_VSU1.7 U3_VSU2.7 U3_VSU3.7
ADC_EOC: J7.17R U2.19
ADC_MISO: J7.13R U2.16
ADC_MOSI: J7.15R U2.17
ADC_NSS: J7.32L U2.15
ADC_SCK: J7.11R U2.18
Buck_Out: F1.2 J2.2 TP7.1
CAN_H: J4.7 R20.2 U1.7
CAN_L: J4.2 R20.1 U1.6
CANRX: J7.14R U1.4
CANTX: J7.12R U1.1
"Ext 3V3": C2.2 D2.2 J2.1 J3.1
"Ext 5V": C3.2 D3.2 J2.3 J5.1 J6.1
GND: C1.1 C2.1 C3.1 C4.1 C5.1 C6.1 C7.1 C8.1 C9.1 C10.1 C11.1 C12.1 C13.1 C14.1 C15.1 C16.1 C18_VSU1.1 C18_VSU2.1 C18_VSU3.1 C19_VSU1.1 C19_VSU2.1 C19_VSU3.1 C20_VSU1.1 C20_VSU2.1 C20_VSU3.1 C21_VSU1.1 C21_VSU2.1 C21_VSU3.1 C22_VSU1.1 C22_VSU2.1 C22_VSU3.1 D1.1 D2.1 D3.1 J1.2 J4.6 J7.8L J7.9R J7.19L J7.20L J7.20R J7.22L J7.32R J9.1 J10.1 J11.1 Q1.3 Q2.3 Q3.3 R1.2 R5.1 R6.1 R7.1 R13_VSU1.1 R13_VSU2.1 R13_VSU3.1 R18_VSU1.1 R18_VSU2.1 R18_VSU3.1 R19_VSU1.1 R19_VSU2.1 R19_VSU3.1 U1.2 U2.10 U3_VSU1.4 U3_VSU2.4 U3_VSU3.4
I_In_OCD_1: J7.2L
I_In_OCD_2: J7.4L J9.7
I_In_OCD_3: J7.19R J9.6
I_In_Sense_1: J7.30L J9.5
I_In_Sense_2: J7.34L J9.4
I_In_Sense_3: J7.36L J9.3
I_Out_OCD_1: J7.1L
I_Out_OCD_2: J7.3L J10.7
I_Out_OCD_3: J7.21L J10.6
I_Out_Sense_1: J7.35L J10.5
I_Out_Sense_2: J7.37L J10.4
I_Out_Sense_3: J7.38L J10.3
LED1: D4.2 J7.1R
LED2: D5.2 J7.2R
LED3: D6.2 J7.4R
NetC17_VSU1_1: C17_VSU1.1 R11_VSU1.2 R12_VSU1.1 TP1_VSU1.1 U3_VSU1.2
NetC17_VSU2_1: C17_VSU2.1 R11_VSU2.2 R12_VSU2.1 TP1_VSU2.1 U3_VSU2.2
NetC17_VSU3_1: C17_VSU3.1 R11_VSU3.2 R12_VSU3.1 TP1_VSU3.1 U3_VSU3.2
NetC18_VSU1_2: C18_VSU1.2 R10_VSU1.2 R11_VSU1.1 R13_VSU1.2
NetC18_VSU2_2: C18_VSU2.2 R10_VSU2.2 R11_VSU2.1 R13_VSU2.2
NetC18_VSU3_2: C18_VSU3.2 R10_VSU3.2 R11_VSU3.1 R13_VSU3.2
NetC21_VSU1_2: C21_VSU1.2 R17_VSU1.2 R18_VSU1.2 TP3_VSU1.1 U3_VSU1.3
NetC21_VSU2_2: C21_VSU2.2 R17_VSU2.2 R18_VSU2.2 TP3_VSU2.1 U3_VSU2.3
NetC21_VSU3_2: C21_VSU3.2 R17_VSU3.2 R18_VSU3.2 TP3_VSU3.1 U3_VSU3.3
NetC22_VSU1_2: C22_VSU1.2 R16_VSU1.2 R17_VSU1.1 R19_VSU1.2
NetC22_VSU2_2: C22_VSU2.2 R16_VSU2.2 R17_VSU2.1 R19_VSU2.2
NetC22_VSU3_2: C22_VSU3.2 R16_VSU3.2 R17_VSU3.1 R19_VSU3.2
NetC23_1: C23.1 D7.1 J12.5 Q1.2
NetC23_2: C23.2 R21.1
NetC24_1: C24.1 D8.1 J12.3 Q2.2
NetC24_2: C24.2 R22.1
NetC25_1: C25.1 D9.1 J12.1 Q3.2
NetC25_2: C25.2 R23.1
NetD4_1: D4.1 R2.1
NetD5_1: D5.1 R3.1
NetD6_1: D6.1 R4.1
NetF1_1: F1.1 J1.1
NetF2_2: F2.2 J4.9
NetJ13_VSU1_1: R14_VSU1.1
NetJ13_VSU1_2: R8_VSU1.1
NetJ13_VSU2_1: R14_VSU2.1
NetJ13_VSU2_2: R8_VSU2.1
NetJ13_VSU3_1: R14_VSU3.1
NetJ13_VSU3_2: R8_VSU3.1
NetQ1_1: Q1.1 R5.2 R26.2
NetQ2_1: Q2.1 R6.2 R24.2
NetQ3_1: Q3.1 R7.2 R25.2
NetR1_1: R1.1 U1.8
NetR8_VSU1_2: R8_VSU1.2 R9_VSU1.1
NetR8_VSU2_2: R8_VSU2.2 R9_VSU2.1
NetR8_VSU3_2: R8_VSU3.2 R9_VSU3.1
NetR9_VSU1_2: R9_VSU1.2 R10_VSU1.1
NetR9_VSU2_2: R9_VSU2.2 R10_VSU2.1
NetR9_VSU3_2: R9_VSU3.2 R10_VSU3.1
NetR14_VSU1_2: R14_VSU1.2 R15_VSU1.1
NetR14_VSU2_2: R14_VSU2.2 R15_VSU2.1
NetR14_VSU3_2: R14_VSU3.2 R15_VSU3.1
NetR15_VSU1_2: R15_VSU1.2 R16_VSU1.1
NetR15_VSU2_2: R15_VSU2.2 R16_VSU2.1
NetR15_VSU3_2: R15_VSU3.2 R16_VSU3.1
OUT_VSU1: C17_VSU1.2 C20_VSU1.2 J7.6R R12_VSU1.2 TP2_VSU1.1 U3_VSU1.6
OUT_VSU2: C17_VSU2.2 C20_VSU2.2 J7.24R R12_VSU2.2 TP2_VSU2.1 U3_VSU2.6
OUT_VSU3: C17_VSU3.2 C20_VSU3.2 J7.34R R12_VSU3.2 TP2_VSU3.1 U3_VSU3.6
Relay_FET_G1: J7.16R R25.1
Relay_FET_G2: J7.18R R24.1
Relay_FET_G3: J7.22R R26.1
STM3V3_Out: J3.3 J7.16L
STM5V_In: J5.2 J7.6L
STM5V_Out: J6.3 J7.18L
STM_VIN: J7.24L J14.1
Temp_Sense_1: C6.2 J11.13 U2.1
Temp_Sense_2: C7.2 J11.12 U2.2
Temp_Sense_3: C8.2 J11.11 U2.3
Temp_Sense_4: C9.2 J11.10 U2.4
Temp_Sense_5: C10.2 J11.9 U2.5
Temp_Sense_6: C11.2 J11.8 U2.6
Temp_Sense_7: C12.2 J11.7 U2.7
Temp_Sense_8: C13.2 J11.6 U2.8
Temp_Sense_9: C14.2 J11.5 U2.9
Temp_Sense_10: C15.2 J11.4 U2.11
Temp_Sense_11: C16.2 J11.3 U2.12
pads on no net: J4.1 J4.3 J4.4 J4.5 J4.8 J4.G1 J4.G2 J7.3R J7.5L J7.5R J7.7L J7.7R J7.8R J7.9L J7.10L J7.10R J7.11L J7.12L J7.13L J7.14L J7.15L J7.17L J7.21R J7.23L J7.23R J7.25L J7.25R J7.26L J7.26R J7.27L J7.27R J7.28L J7.28R J7.29L J7.29R J7.30R J7.31L J7.31R J7.33L J7.33R J7.35R J7.36R J7.37R J7.38R J7.None J9.None J10.None J11.14 J11.None J12.None J13_VSU1.None J13_VSU1.P$1 J13_VSU1.P$2 J13_VSU2.None J13_VSU2.P$1 J13_VSU2.P$2 J13_VSU3.None J13_VSU3.P$1 J13_VSU3.P$2 U1.5 U2.13 U2.14 U3_VSU1.1 U3_VSU1.5 U3_VSU1.8 U3_VSU2.1 U3_VSU2.5 U3_VSU2.8 U3_VSU3.1 U3_VSU3.5 U3_VSU3.8

## Polygon pours and split planes (outlines as drawn)
GND on Int1 (GND) (split plane): 199.49,149.49 199.49,0.51 0.51,0.51 0.51,149.49